# Altium PCB 电子脚铐手持式主控板V3.PcbDoc (part 1 of 3)
Units mm, origin at the board's own origin, x right, y up, seen from the top; angles counter-clockwise.
Board outline 100 x 95 mm, 2 copper layers (Top Layer, Bottom Layer); 124 components, 70 nets, 370 pads, 89 vias.
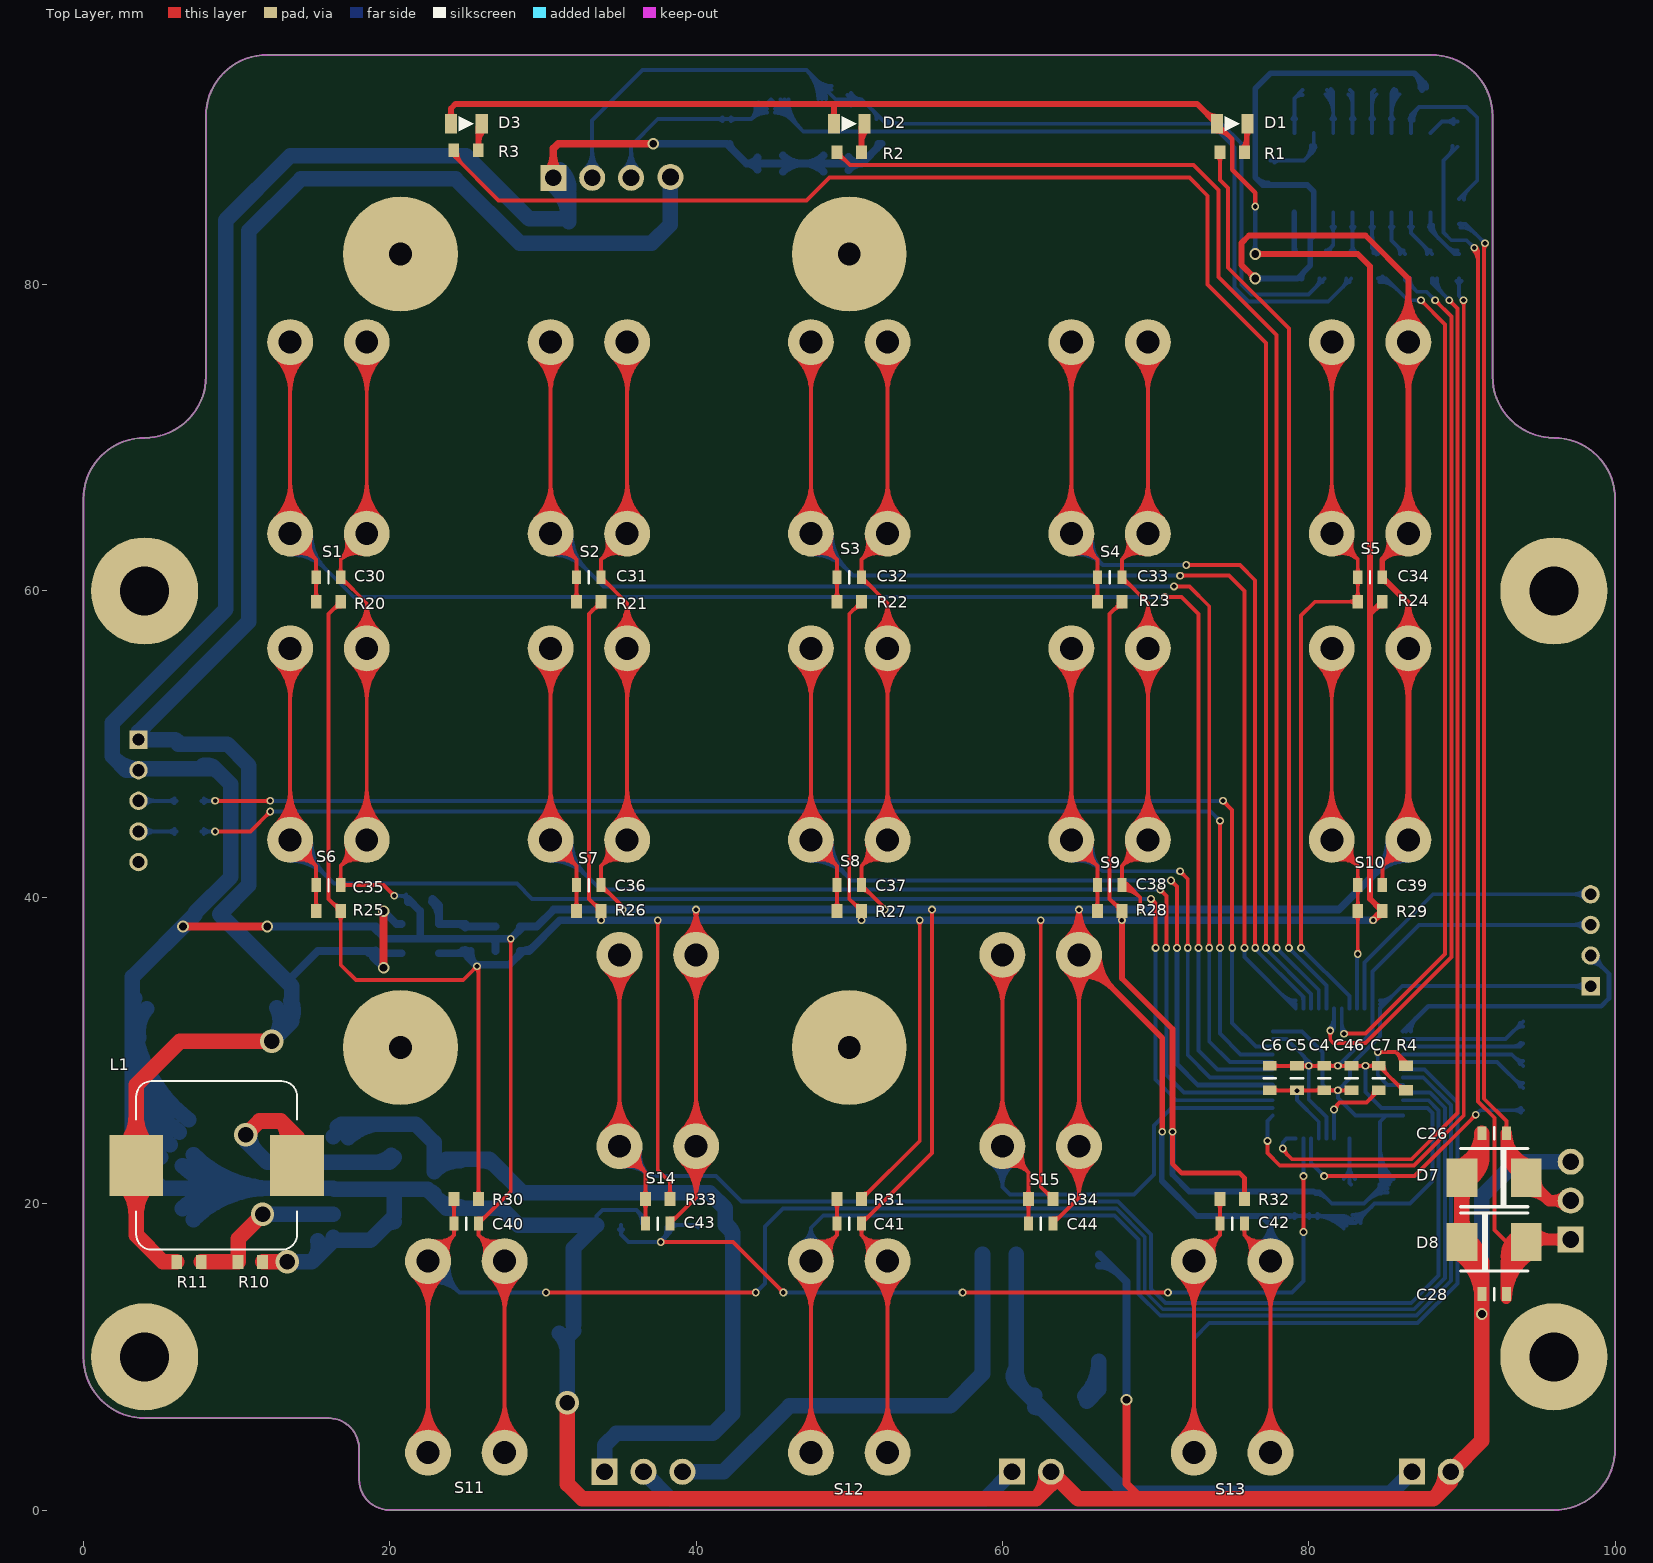
[diagram p0: Top Layer view]
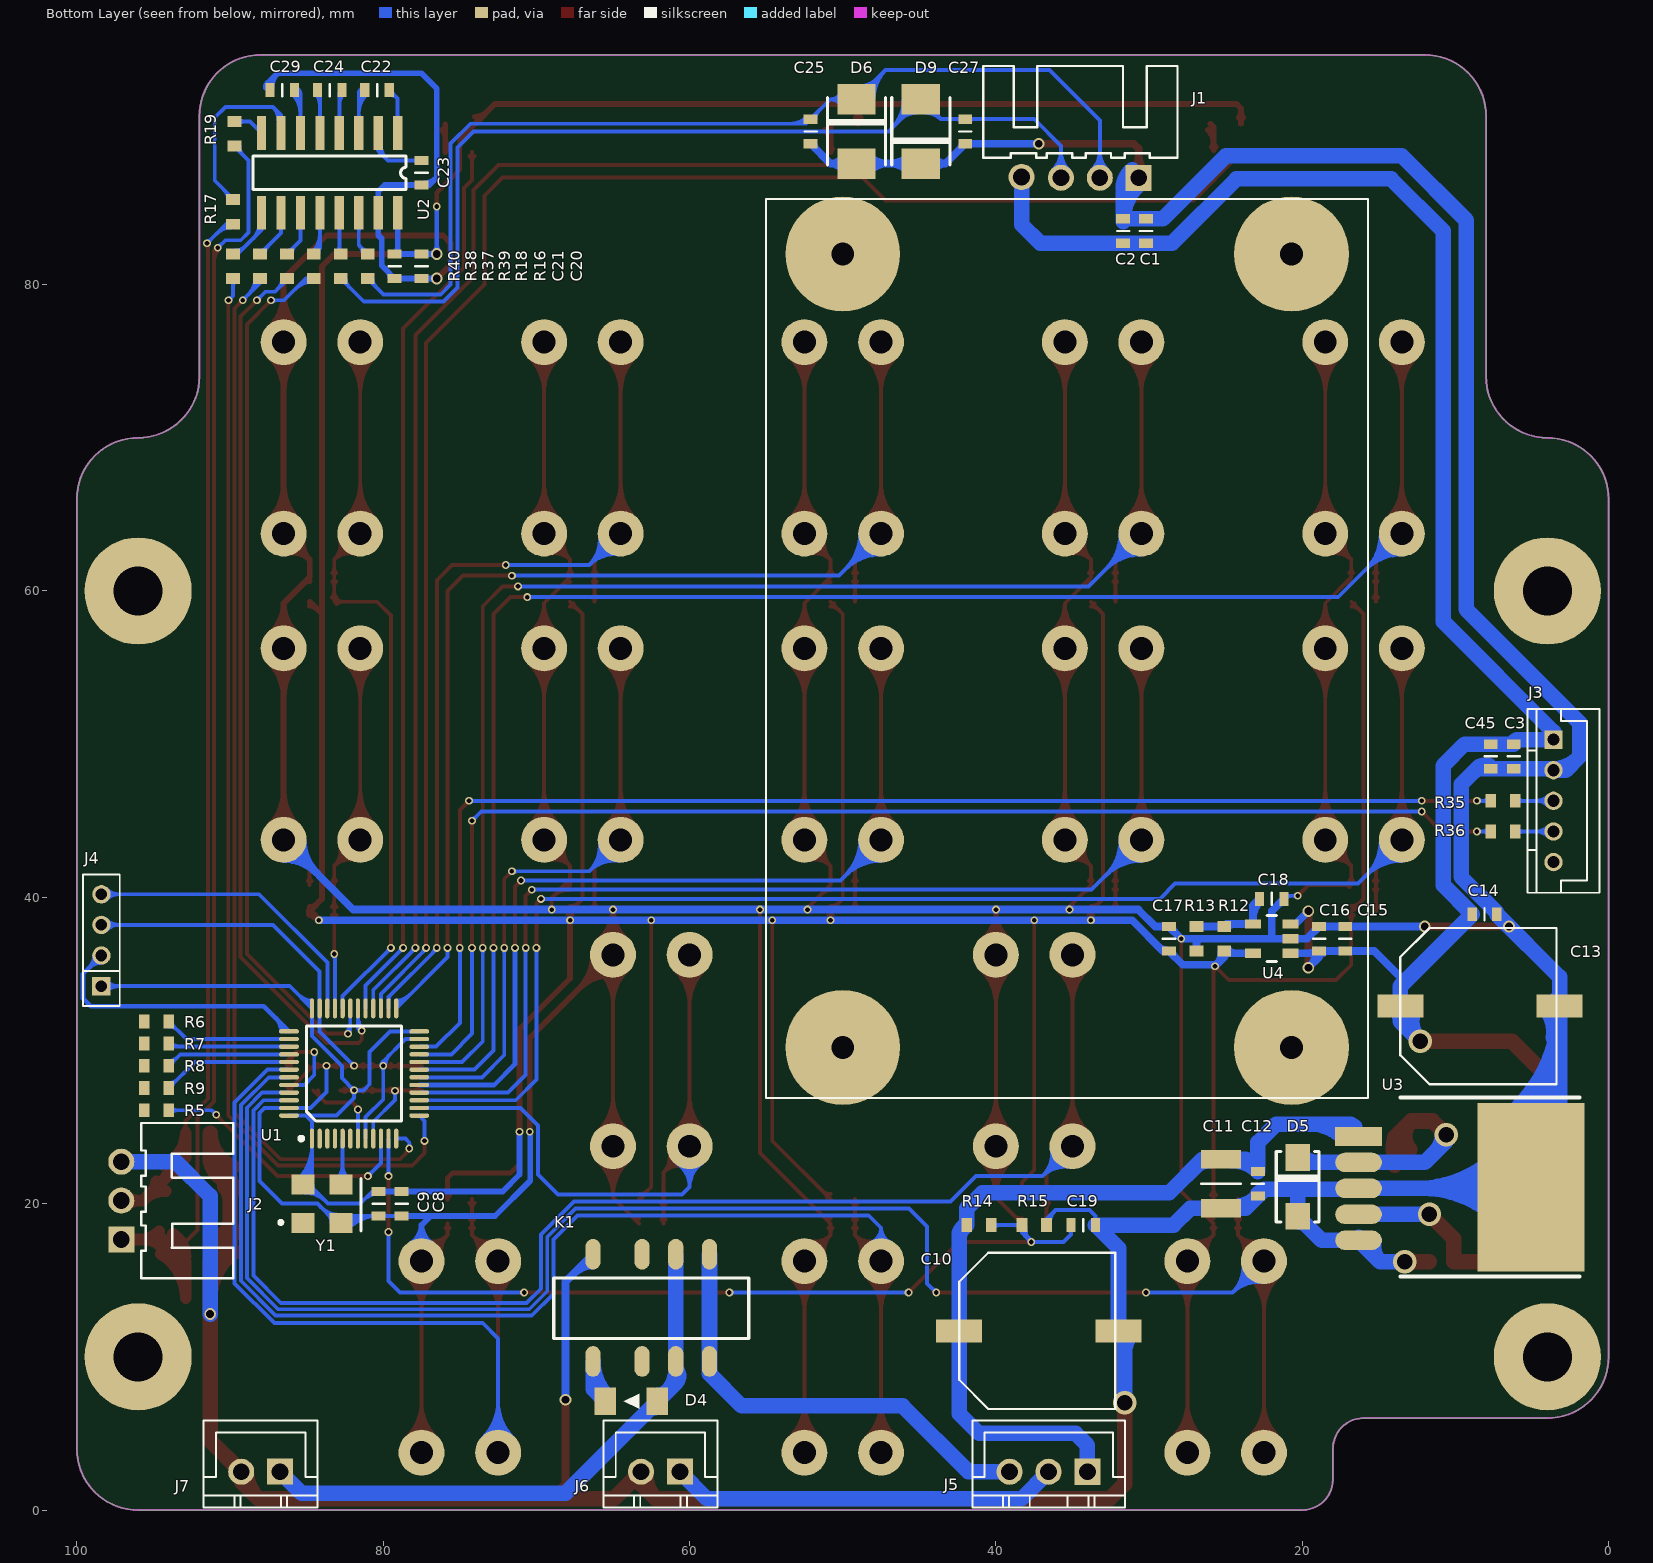
[diagram p1: Bottom Layer view, seen from below]
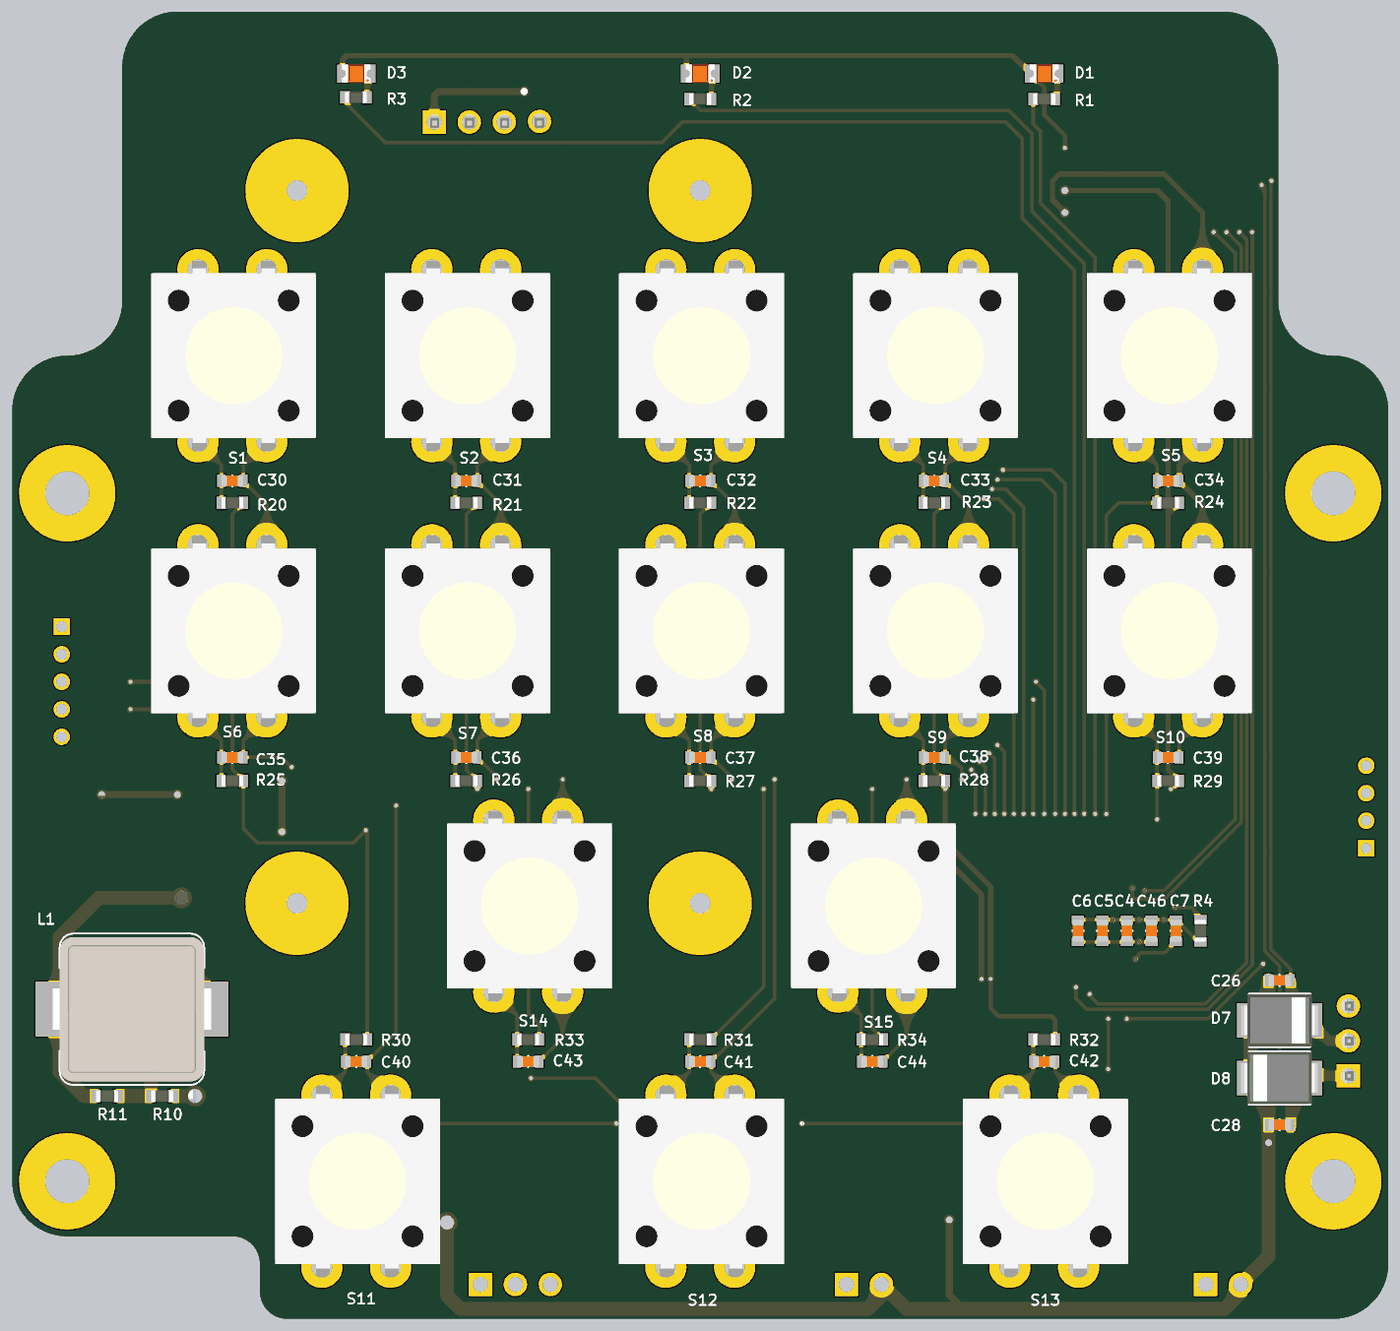
[diagram p4: 3D render of the assembled board from above, using the file's embedded part models]
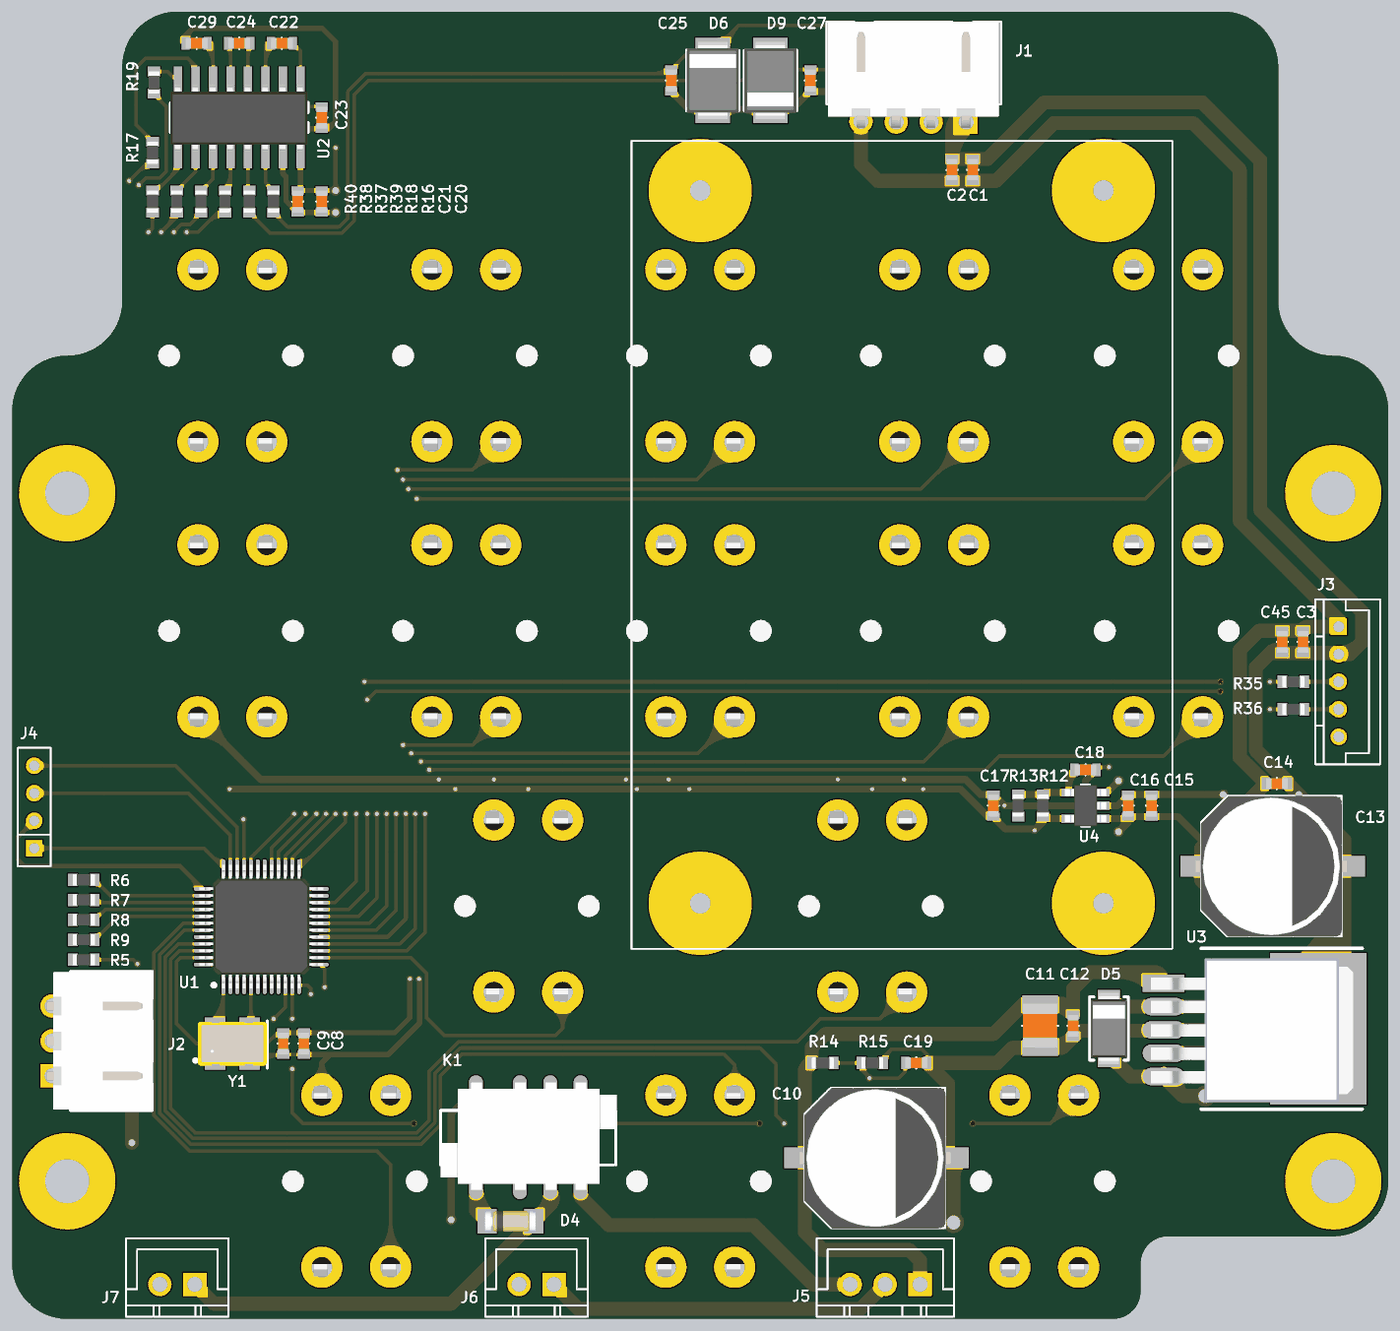
[diagram p5: 3D render of the assembled board from below, using the file's embedded part models]

## Layer stack, top to bottom
Top Solder: solder mask 0.0102, Solder Resist, Dk 3.5
Top Layer: signal copper 0.0356
Dielectric 1: dielectric 0.32, FR-4, Dk 4.8
Bottom Layer: signal copper 0.0356
Bottom Solder: solder mask 0.0102, Solder Resist, Dk 3.5

## Board outline
4,6 cw(c4,10) 0,10 0,66 cw(c4,66) 4,70 ccw(c4,74) 8,74 8,91 cw(c12,91) 12,95 88,95 cw(c88,91) 92,91 92,74 ccw(c96,74) 96,70 cw(c96,66) 100,66 100,4 cw(c96,4) 96,0 20,0 cw(c20,2) 18,2 18,4 ccw(c16,4) 16,6

## Design rules (kind name [scope] priority, off if disabled: settings)
Clearance [All] p1: gap=0.152
ComponentClearance [All] p1: gap=0 collisioncheckmode=3 verticalgap=0 showdistances=FALSE
Height [All] p1: minheight=0 maxheight=50.8 prefheight=12.7
HoleSize [All] p1: absolutevalues=TRUE maxlimit=5.08 minlimit=0.025 maxpercent=80.000 minpercent=20.000
HoleToHoleClearance [All] p1: gap=0.152 allowstackedmicrovias=TRUE
MinimumSolderMaskSliver [All] p1: minsoldermaskwidth=0
PlaneConnect [All] p1: planeconnectstyle=Direct reliefexpansion=0.508 reliefentries=4 reliefconductorwidth=0.254 reliefairgap=0.254
PolygonConnect [All] p1: connectstyle=Direct reliefconductorwidth=0.254 reliefentries=4 polygonreliefangle="90 Angle" airgapwidth=0.254
RoutingVias [All] p1: holewidth=0.711 width=1.27 viastyle="Through Hole" minholewidth=0.203 minwidth=0.305 maxholewidth=5.08 maxwidth=7.62
SilkToSilkClearance [All] p1: silktosilkclearance=0
SilkToSolderMaskClearance [IsPad] p1: minsilkscreentomaskgap=0 clearancetoexposedcopper=TRUE
SolderMaskExpansion [All] p1: expansion=0.102
Width [All] p1: maxlimit=4 minlimit=0.254 preferedwidth=0.254
21 further rules are at their usual default settings.

## Classes and differential pairs
component class Designator: C30 C31 C32 C33 C34 C35 C36 C37 C38 C39 C40 C41 C42 C43 C44 R20 R21 R22 R23 R24 R25 R26 R27 R28 R29 R30 R31 R32 R33 R34 S1 S2 S3 S4 S5 S6 S7 S8 S9 S10 S11 S12 S13 S14 S15
component class 电子脚铐手持式主控板_Frame: C1 C2 C3 C45 J1 J2 J3 R35 R36

## Components (designator, comment, footprint, x,y, rotation, side; value= is the part's Value field where it differs from the comment)
C1 "10uF" C0603 30.2,83.5 r90 bottom
C2 "0.1uF" C0603 31.7,83.5 r90 bottom
C3 "0.1uF" C0603 6.2,49.2 r270 bottom
C4 "0.1uF" C0603 81.01,28.2 r90 top
C5 "0.1uF" C0603 79.23,28.2 r90 top
C6 "0.1uF" C0603 77.45,28.2 r90 top
C7 "0.1uF" C0603 84.57,28.2 r90 top
C8 "10uF" C0603 78.8,20 r90 bottom
C9 "0.1uF" C0603 80.3,20 r90 bottom
C10 "470uF/35V" C10*10.8 37.3,11.7 r90 bottom
C11 "22uF" C1210 25.3,21.3 r270 bottom
C12 "0.1uF" C0603 22.9,21.3 r270 bottom
C13 "470uF/35V" C10*10.8 8.5,32.9 r90 bottom
C14 "0.1uF" C0603 8.1,38.9 r180 bottom
C15 "10uF" C0603 17.2,37.3 r90 bottom
C16 "0.1uF" C0603 18.9,37.3 r90 bottom
C17 "10uF" C0603 28.7,37.3 r90 bottom
C18 "470pF" C0603 22,39.9 r180 bottom
C19 "0.1uF" C0603 34.3,18.6 r180 bottom
C20 "10uF" C0603 77.5,81.2 r270 bottom
C21 "0.1uF" C0603 79.257,81.2 r270 bottom
C22 "0.1uF" C0603 80.4,92.7 r0 bottom
C23 "0.1uF" C0603 77.5,87.3 r90 bottom
C24 "0.1uF" C0603 83.5,92.7 r0 bottom
C25 "100pF" C0603 52.1,90 r90 bottom
C26 "100pF" C0603 92.1,24.6 r0 top
C27 "100pF" C0603 42,90 r270 bottom
C28 "100pF" C0603 92.1,14.1 r180 top
C29 "0.1uF" C0603 86.6,92.7 r180 bottom
C30 "0.1uF" C0603 16,60.9 r0 top
C31 "0.1uF" C0603 33,60.9 r0 top
C32 "0.1uF" C0603 50,60.9 r0 top
C33 "0.1uF" C0603 67,60.9 r0 top
C34 "0.1uF" C0603 84,60.9 r0 top
C35 "0.1uF" C0603 16,40.8 r0 top
C36 "0.1uF" C0603 33,40.8 r0 top
C37 "0.1uF" C0603 50,40.8 r0 top
C38 "0.1uF" C0603 67,40.8 r0 top
C39 "0.1uF" C0603 84,40.8 r0 top
C40 "0.1uF" C0603 25,18.7 r0 top
C41 "0.1uF" C0603 50,18.7 r0 top
C42 "0.1uF" C0603 75,18.7 r0 top
C43 "0.1uF" C0603 37.5,18.7 r0 top
C44 "0.1uF" C0603 62.5,18.7 r0 top
C45 "10uF" C0603 7.7,49.2 r270 bottom
C46 "0.1uF" C0603 82.79,28.2 r90 top
D1 "LED" LED0805 75,90.5 r0 top locked
D2 "LED" LED0805 50,90.5 r0 top locked
D3 "LED" LED0805 25,90.5 r0 top locked
D4 "1N4148" SOD-80-S 63.8,7.1 r0 bottom
D5 "SS14" SMA 20.3,21.1 r90 bottom
D6 "SMBJ16CA" SMB 49.1,90 r90 bottom
D7 "SMBJ16CA" SMB 92.1,21.7 r0 top
D8 "SMBJ16CA" SMB 92.1,17.5 r180 top
D9 "SMBJ16CA" SMB 44.9,90 r270 bottom
J1 "Jack 1x4" XH-4AW 34.5,87 r180 bottom
J2 "Jack 1x3" XH-3AW 97.1,20.2 r270 bottom
J3 "Jack 1x5" PH-5A 3.6,46.3 r270 bottom
J4 "SHD1X4-2.00" Jk1*4-2.0 98.4,37.2 r90 bottom
J5 "YX-XH-3" YX-XH-3 36.565,2.5 r180 bottom
J6 "YX-XH-2" YX-XH-2 61.9,2.502 r180 bottom
J7 "YX-XH-2" YX-XH-2 88,2.502 r180 bottom
K1 "G6K-2F-Y-12V" G6K-2F-Y 62.5,13.2 r180 bottom
L1 "33uH" L10.5*11.5mm 8.7,22.5 r180 top
R1 "1K" R0603 75,88.646 r0 top locked
R2 "1K" R0603 50,88.646 r0 top locked
R3 "1K" R0603 24.981,88.773 r0 top locked
R4 "100K" R0603 86.35,28.2 r270 top
R5 "NC" R0603 94.8,26.1 r0 bottom
R6 "NC" R0603 94.8,31.9 r0 bottom
R7 "NC" R0603 94.8,30.45 r0 bottom
R8 "NC" R0603 94.8,29 r0 bottom
R9 "NC" R0603 94.8,27.55 r0 bottom
R10 "3.3K" R0603 10.9,16.2 r0 top
R11 "10K" R0603 6.9,16.2 r0 top
R12 "100K" R0603 25.1,37.3 r90 bottom
R13 "160K" R0603 26.9,37.3 r270 bottom
R14 "100K" R0603 41.1,18.6 r0 bottom
R15 "10K" R0603 37.5,18.6 r0 bottom
R16 "10R" R0603 81.014,81.2 r270 bottom
R17 "10R" R0603 89.8,84.75 r270 bottom
R18 "10R" R0603 82.771,81.2 r270 bottom
R19 "10R" R0603 89.7,89.85 r270 bottom
R20 "10K" R0603 16,59.3 r0 top
R21 "10K" R0603 33,59.3 r0 top
R22 "10K" R0603 50,59.3 r0 top
R23 "10K" R0603 67,59.3 r0 top
R24 "10K" R0603 84,59.3 r0 top
R25 "10K" R0603 16,39.1 r0 top
R26 "10K" R0603 33,39.1 r0 top
R27 "10K" R0603 50,39.1 r0 top
R28 "10K" R0603 67,39.1 r0 top
R29 "10K" R0603 84,39.1 r0 top
R30 "10K" R0603 25,20.3 r0 top
R31 "10K" R0603 50,20.3 r0 top
R32 "10K" R0603 75,20.3 r0 top
R33 "10K" R0603 37.5,20.3 r0 top
R34 "10K" R0603 62.5,20.3 r0 top
R35 "10R" R0603 6.9,46.3 r0 bottom
R36 "10R" R0603 6.9,44.3 r0 bottom
R37 "10R" R0603 86.286,81.2 r90 bottom
R38 "10R" R0603 88.043,81.2 r90 bottom
R39 "10R" R0603 84.529,81.2 r90 bottom
R40 "10R" R0603 89.8,81.2 r90 bottom
S1 "Switch" B3F-4055 16,70 r90 top locked
S2 "Switch" B3F-4055 33,70 r90 top locked
S3 "Switch" B3F-4055 50,70 r90 top locked
S4 "Switch" B3F-4055 67,70 r90 top locked
S5 "Switch" B3F-4055 84,70 r90 top locked
S6 "Switch" B3F-4055 16,50 r90 top locked
S7 "Switch" B3F-4055 33,50 r90 top locked
S8 "Switch" B3F-4055 50,50 r90 top locked
S9 "Switch" B3F-4055 67,50 r90 top locked
S10 "Switch" B3F-4055 84,50 r90 top locked
S11 "Switch" B3F-4055 25,10 r90 top
S12 "Switch" B3F-4055 50,10 r90 top
S13 "Switch" B3F-4055 75,10 r90 top locked
S14 "Switch" B3F-4055 37.5,30 r90 top locked
S15 "Switch" B3F-4055 62.5,30 r90 top locked
U1 "STM32F103CB" LQFP48 81.9,28.5 r90 bottom
U2 "SP3232EEN" SO16 83.5,87.3 r270 bottom
U3 "LM2596-ADJ" TO-263-5 10.7,21 r270 bottom
U4 "MIC5219YM5" SOT-23-5 22,37.3 r0 bottom
Y1 "XTAL 8MHz" XTAL5032 84,20 r180 bottom

## Footprints (in the part's own frame and the unit in brackets; to place one, negate y for a bottom-side part, rotate by r counter-clockwise, add the part's x,y. Pads: shape width x height; smd on the part's side, far side on the other; paste and mask are expansions set on the pad)
B3F-4055 [mm]
  round 3 hole 1.5: 1(-6.25,-2.5) 1(6.25,-2.5) 2(-6.25,2.5) 2(6.25,2.5)
  body extent -6.9,-6.1 6.9,5.9, height 7.3
C10*10.8 [mm] "470uF/35V"
  rect 1.5x3 smd: 1(0,5.1) 2(0,-5.3)
  silkscreen extent -5.1,-5.1 5.1,5.1, body extent -5.13,-5.5 5.1,5.5, height 10.56
C0603 [mm]
  rect 0.6x0.9 smd: 1(-0.8,0) 2(0.8,0)
  silkscreen extent 0,-0.4 0,0.4, body extent -0.8,-0.4 0.8,0.4, height 0.5
C1210 [mm]
  rect 1.2x2.6 smd: 1(-1.6,0) 2(1.6,0)
  silkscreen extent 0,-1.3 0,1.3, body extent -1.6,-1.25 1.6,1.25, height 0.95
G6K-2F-Y [mm]
  oval 1x2 smd: 1(-3.8,-3.5) 2(-0.6,-3.5) 3(1.6,-3.5) 4(3.8,-3.5) 5(3.8,3.5) 6(1.6,3.5) 7(-0.6,3.5) 8(-3.8,3.5)
  silkscreen extent -6.37,-2.01 6.36,1.95, body extent -6.36,-3.83 6.44,3.97, height 5.4
Jk1*4-2.0 [mm] "4P，直插，2.0mm间距，排母"
  rect 1.2x1.2 hole 0.762: 1(-3,0)
  round 1.2 hole 0.762: 2(-1,0) 3(1,0) 4(3,0)
  silkscreen extent -4.3,-1.2 4.3,1.2, body extent -4.25,-1.22 4.25,1.18, height 4.3
L10.5*11.5mm [mm] "AMPI104CEL"
  rect 3.5x4 smd: 1(-5.25,0) 2(5.25,0)
  silkscreen extent -5.25,-5.5 5.25,5.5, body extent -5.75,-5.25 5.75,5.25, height 4.01
LED0805 [mm]
  rect 0.8x1.3 smd: 1(-1,0) 2(1,0)
  silkscreen extent -0.5,-0.5 0.5,0.5, body extent -1.05,-0.68 1.05,0.67, height 0.8
LQFP48 [mm]
  oval 1.3x0.28 smd: 1(-4.25,2.75) 2(-4.25,2.25) 3(-4.25,1.75) 4(-4.25,1.25) 5(-4.25,0.75) 6(-4.25,0.25) 7(-4.25,-0.25) 8(-4.25,-0.75) 9(-4.25,-1.25) 10(-4.25,-1.75) 11(-4.25,-2.25) 12(-4.25,-2.75) 25(4.25,-2.75) 26(4.25,-2.25) 27(4.25,-1.75) 28(4.25,-1.25) 29(4.25,-0.75) 30(4.25,-0.25) 31(4.25,0.25) 32(4.25,0.75) 33(4.25,1.25) 34(4.25,1.75) 35(4.25,2.25) 36(4.25,2.75)
  oval 0.28x1.3 smd: 13(-2.75,-4.25) 14(-2.25,-4.25) 15(-1.75,-4.25) 16(-1.25,-4.25) 17(-0.75,-4.25) 18(-0.25,-4.25) 19(0.25,-4.25) 20(0.75,-4.25) 21(1.25,-4.25) 22(1.75,-4.25) 23(2.25,-4.25) 24(2.75,-4.25) 37(2.75,4.25) 38(2.25,4.25) 39(1.75,4.25) 40(1.25,4.25) 41(0.75,4.25) 42(0.25,4.25) 43(-0.25,4.25) 44(-0.75,4.25) 45(-1.25,4.25) 46(-1.75,4.25) 47(-2.25,4.25) 48(-2.75,4.25)
  silkscreen extent -4.37,-3.1 3.1,3.58, body extent -4.49,-4.5 4.5,4.5, height 1.8
PH-5A [mm] "5P，立贴，2.0mm间距，无锁座"
  rect 1.2x1.2 hole 0.8: 1(-4,0)
  round 1.2 hole 0.8: 2(-2,0) 3(0,0) 4(2,0) 5(4,0)
  silkscreen extent -6,-1.7 6,3
R0603 [mm]
  rect 0.7x0.9 smd: 1(-0.8,0) 2(0.8,0)
  body extent -0.8,-0.4 0.8,0.4, height 0.37
SMA [mm]
  rect 1.75x1.6 smd: 1(-1.925,0) 2(1.925,0)
  silkscreen extent -2.3,-1.5 2.3,1.5, body extent -2.6,-1.32 2.6,1.32, height 2.15
SMB [mm]
  rect 2x2.5 smd: 1(-2.1,0) 2(2.1,0)
  silkscreen extent -2.2,-1.9 2.2,1.9, body extent -2.79,-1.91 2.81,1.89, height 2.4
SO16 [mm]
  rect 2.2x0.6 smd: 1(-2.6,4.445) 2(-2.6,3.175) 3(-2.6,1.905) 4(-2.6,0.635) 5(-2.6,-0.635) 6(-2.6,-1.905) 7(-2.6,-3.175) 8(-2.6,-4.445) 9(2.6,-4.445) 10(2.6,-3.175) 11(2.6,-1.905) 12(2.6,-0.635) 13(2.6,0.635) 14(2.6,1.905) 15(2.6,3.175) 16(2.6,4.445)
  silkscreen extent -1.1,-5 1.1,5, body extent -2.92,-5.02 3.02,4.95, height 1.35
SOD-80-S [mm]
  rect 1.4x1.8 smd: 1(-1.7,0) 2(1.7,0)
  silkscreen extent -0.5,-0.5 0.5,0.5, body extent -1.85,-0.79 1.85,0.81, height 1.6
SOT-23-5 [mm]
  rect 1.05x0.6 smd: 1(-1.225,0.95) 2(-1.225,0) 3(-1.225,-0.95) 4(1.225,-0.95) 5(1.225,0.95)
  silkscreen extent -0.3,-1.5 0.3,1.5, body extent -1.5,-1.5 1.5,1.5, height 1.2
TO-263-5 [mil]
  rect 433.07x275.59 smd: 0(-3.33,221.44)
  rect 50x120 smd: 1(-133.33,-221.44)
  oval 50x120 smd: 2(-66.67,-221.44) 3(0,-221.44) 4(66.67,-221.44) 5(133.33,-221.44)
  silkscreen extent -233,-114 227,346, body extent -204,-258 207,321, height 177
XH-3AW [mm]
  rect 1.7x1.7 hole 1.1: 1(2.54,0)
  round 1.7 hole 1.1: 2(0,0) 3(-2.54,0)
  silkscreen extent -5.07,1.3 5.07,7.3, body extent -5,-0.37 5,7.33, height 5.85
XH-4AW [mm]
  rect 1.7x1.7 hole 1.1: 1(3.823,-0.025)
  round 1.7 hole 1.1: 2(1.283,-0.025) 3(-1.257,-0.025) 4(-3.822,0.025)
  silkscreen extent -6.33,1.27 6.35,7.27, body extent -6.2,-0.42 6.2,7.28, height 5.75
XTAL5032 [mm]
  rect 1.5x1.3 smd: 1(-1.25,-1.25) 2(1.25,-1.25) 3(1.25,1.25) 4(-1.25,1.25)
  silkscreen extent -2.81,-1.78 2.54,1.65, body extent -2.5,-1.6 2.5,1.6, height 1.2
YX-XH-2 [mm] "2P，直插，2.54mm间距，无锁座"
  rect 1.7x1.7 hole 1.1: 1(1.27,0)
  round 1.7 hole 1.1: 2(-1.27,0)
  silkscreen extent -3.72,-2.35 3.72,3.35, body extent -3.71,-2.36 3.73,3.34, height 7
YX-XH-3 [mm] "3P，直插，2.54mm间距，无锁座"
  rect 1.7x1.7 hole 1.1: 1(2.54,0)
  round 1.7 hole 1.1: 2(0,0) 3(-2.54,0)
  silkscreen extent -4.98,-2.35 5,3.35, body extent -4.98,-2.33 5,3.37, height 7

## Part data
C1 C2 C3 C4 C5 C6 C7 C8 C9 C11 C12 C14 C15 C16 C17 C18 C19 C20 C21 C22 C23 C24 C25 C26 C27 C28 C29 C45 C46: library part CAP, "CAP"
C10 C13: library part ELECTRO, "Electrolytic Capacitor"
C30 C31 C32 C33 C34 C35 C36 C37 C38 C39 C40 C41 C42 C43 C44: library part Cap, "Capacitor"
D4: library part DIODE-SWITCHING, "Silicon Epitaxial Planar Diodes"
D5: library part "Diode 1N4148", "High Conductance Fast Diode"
D6 D7 D8 D9: library part BS0300N
J1 J2 J3: "插座"
J4: library part HEADER1X4
J5: library part HEADER1X3
J6 J7: library part "Jack 1x2", "插座"
K1: library part G6K-2F-Y
L1: library part INDUCTOR, "INDUCTOR"
R1 R2 R3 R4 R5 R6 R7 R8 R9 R10 R11 R14 R15 R20 R21 R22 R23 R24 R25 R26 R27 R28 R29 R30 R31 R32 R33 R34: library part RES, "Resistor"
R12 R13: library part Res
R16 R17 R18 R19 R35 R36 R37 R38 R39 R40: library part Res, "Resistor"
S1 S2 S3 S4 S5 S6 S7 S8 S9 S10 S11 S12 S13 S14 S15: library part Sw
U1: library part STM32F103Cx
U2: library part MAX232ACPE, "+5V Powered, Multi-Channel RS-232 Driver/Receiver"
U3: library part LM25x6-5, "LM2596-5;LM2576-5"
U4: library part MIC5205
Y1: library part XTAL

## Free pads (board coordinates)
  round 7 hole 3.2: ""(4,10) ""(4,60) ""(96,10) ""(96,60)
  round 7.5 hole 1.5: ""(20.7,30.2) ""(20.7,82) ""(50,30.2) ""(50,82)

## Via types
v1: diameter 0.508, hole 0.305, Top Layer to Bottom Layer, tented both sides, 75 vias
v2: diameter 0.762, hole 0.508, Top Layer to Bottom Layer, tented both sides, 9 vias
v3: diameter 1.524, hole 1.016, Top Layer to Bottom Layer, tented both sides, 5 vias

## Nets (pads, with @x,y where several pads share a name; then routed paths per layer and width w, separated by ;. In a path a pad name is that pad's centre, name@x,y a point inside that pad or via, vN(x,y) a via of type N, cw(c..) or ccw(c..) an arc to the next point about the centre after c; other vN are vias at no path point)
+3.3V: C4.1 C5.1 C6.1 C8.2 C9.2 C17.1 C20.1 C21.1 C46.1 D1.1 D2.1 D3.1 J4.1 R12.1 R20.2 R21.2 R22.2 R23.2 R24.2 R25.2 R26.2 R27.2 R28.2 R29.2 R30.2 R31.2 R32.2 R33.2 R34.2 U1.1 U1.9 U1.24 U1.36 U1.48 U2.16 U4.5 Y1.4 | length 493
  Top Layer w0.254: 16.249,39.651 ccw(c16.8,40.203) R25.2@16.8,39.423 ; 16.249,58.749 cw(c16.8,58.197) R20.2@16.8,58.977 ; R25.2@16.49,39.41 cw(c16.28,39.2) R25.2@16.577,39.2 ; R20.2@16.49,58.99 ccw(c16.28,59.2) R20.2@16.577,59.2 ; R25.2@16.642,38.842 cw(c16.262,38.462) 16.8,38.462 cw(c17.338,38.462) R25.2@16.958,38.842 ; R20.2@16.8,59.3 16,58.5 16,39.9 R25.2@16.8,39.1 16.8,35.6 17.8,34.6 24.8,34.6 v1(25.7,35.5) ; v1@25.573,35.5 cw(c25.266,35.5) 25.483,35.283 cw(c25.7,35.066) v1@25.7,35.373 ; v1@25.61,35.41 cw(c25.152,34.952) 25.8,34.952 ; R30.2@25.642,20.558 ccw(c25.262,20.938) 25.8,20.938 ccw(c26.338,20.938) R30.2@25.958,20.558 ; R30.2@25.8,20.3 v1@25.8,35.4 ; 33.249,39.651 ccw(c33.8,40.203) R26.2@33.8,39.423 ; 33.249,58.749 cw(c33.8,58.197) R21.2@33.8,58.977 ; R26.2@33.49,39.41 cw(c33.28,39.2) R26.2@33.577,39.2 ; R21.2@33.49,58.99 ccw(c33.28,59.2) R21.2@33.577,59.2 ; R26.2@33.651,38.834 cw(c33.351,38.5) v1(33.8,38.5) ; v1@33.71,38.59 ccw(c33.493,38.807) 33.8,38.807 ccw(c34.107,38.807) v1@33.89,38.59 ; R21.2@33.8,59.3 33,58.5 33,39.9 R26.2@33.8,39.1 v1(33.8,38.5) ; R26.2@33.949,38.834 ccw(c34.249,38.5) v1(33.8,38.5) ; v1@37.41,38.41 cw(c37.193,38.193) 37.5,38.193 cw(c37.807,38.193) v1@37.59,38.41 ; v1(37.5,38.5) 37.5,22.2 38.3,21.4 R33.2@38.3,20.3 ; R33.2@38.142,20.558 ccw(c37.762,20.938) 38.3,20.938 ccw(c38.838,20.938) R33.2@38.458,20.558 ; 50.249,39.651 ccw(c50.8,40.203) R27.2@50.8,39.423 ; 50.249,58.749 cw(c50.8,58.197) R22.2@50.8,58.977 ; R27.2@50.49,39.41 cw(c50.28,39.2) R27.2@50.577,39.2 ; R22.2@50.49,58.99 ccw(c50.28,59.2) R22.2@50.577,59.2 ; R27.2@50.651,38.834 cw(c50.351,38.5) v1(50.8,38.5) ; v1@50.71,38.59 ccw(c50.493,38.807) 50.8,38.807 ccw(c51.107,38.807) v1@50.89,38.59 ; R31.2@50.8,20.3 54.6,24.1 v1(54.6,38.5) ; R31.2@50.8,20.623 ccw(c50.8,21.403) 51.351,20.851 ; R22.2@50.8,59.3 50,58.5 50,39.9 R27.2@50.8,39.1 v1(50.8,38.5) ; R27.2@50.949,38.834 ccw(c51.249,38.5) v1(50.8,38.5) ; R31.2@51.023,20.4 cw(c51.32,20.4) R31.2@51.11,20.61 ; v1@54.51,38.41 cw(c54.293,38.193) 54.6,38.193 cw(c54.907,38.193) v1@54.69,38.41 ; v1@62.41,38.41 cw(c62.193,38.193) 62.5,38.193 cw(c62.807,38.193) v1@62.59,38.41 ; v1(62.5,38.5) 62.5,21.1 R34.2@63.3,20.3 ; 62.749,20.851 ccw(c63.3,21.403) R34.2@63.3,20.623 ; R34.2@62.99,20.61 cw(c62.78,20.4) R34.2@63.077,20.4 ; 67.249,39.651 ccw(c67.8,40.203) R28.2@67.8,39.423 ; 67.249,58.749 cw(c67.8,58.197) R23.2@67.8,58.977 ; R28.2@67.49,39.41 cw(c67.28,39.2) R28.2@67.577,39.2 ; R23.2@67.49,58.99 ccw(c67.28,59.2) R23.2@67.577,59.2 ; R28.2@67.651,38.834 cw(c67.351,38.5) v1(67.8,38.5) ; v1@67.71,38.59 ccw(c67.493,38.807) 67.8,38.807 ccw(c68.107,38.807) v1@67.89,38.59 ; R23.2@67.8,59.3 67,58.5 67,39.9 R28.2@67.8,39.1 v1(67.8,38.5) ; R28.2@67.949,38.834 ccw(c68.249,38.5) v1(67.8,38.5) ; C6.1@77.45,27.4 C5.1@79.23,27.4 C4.1@81.01,27.4 C46.1@82.79,27.4 ; C6.1@77.722,27.278 cw(c78.018,26.982) 78.018,27.4 cw(c78.018,27.818) C6.1@77.722,27.522 ; C5.1@78.851,27.4 cw(c78.851,26.991) C5.1@79.14,27.28 ; C5.1@78.958,27.278 ccw(c78.662,26.982) 78.662,27.4 ccw(c78.662,27.818) C5.1@78.958,27.522 ; C5.1@79.32,27.28 cw(c79.609,26.991) C5.1@79.609,27.4 ; C5.1@79.502,27.278 cw(c79.798,26.982) 79.798,27.4 cw(c79.798,27.818) C5.1@79.502,27.522 ; C4.1@80.738,27.278 ccw(c80.442,26.982) 80.442,27.4 ccw(c80.442,27.818) C4.1@80.738,27.522 ; C4.1@81.282,27.278 cw(c81.578,26.982) 81.578,27.4 cw(c81.578,27.818) C4.1@81.282,27.522 ; v1@81.81,27.31 ccw(c81.593,27.093) 81.593,27.4 ccw(c81.593,27.707) v1@81.81,27.49 ; v1@81.99,27.31 cw(c82.207,27.093) 82.207,27.4 cw(c82.207,27.707) v1@81.99,27.49 ; C46.1@82.518,27.278 ccw(c82.222,26.982) 82.222,27.4 ccw(c82.222,27.818) C46.1@82.518,27.522
  Top Layer w0.305: v1(71.1,24.7) 71.1,22.6 71.7,22 75.5,22 75.8,21.7 R32.2@75.8,20.3 ; D1.1@74,90.002 cw(c74,88.801) 74.85,89.65 ; D1.1@74,90.5 75,89.5 75,87.5 76.5,86 v1(76.5,85.1) ; R32.2@75.66,20.54 ccw(c75.323,20.877) 75.8,20.877 ccw(c76.277,20.877) R32.2@75.94,20.54
  Top Layer w0.381: D3.1@23.852,90.898 ccw(c23.494,91.256) 24,91.256 ccw(c24.506,91.256) D3.1@24.148,90.898 ; D3.1@24,90.5 24,91.5 24.3,91.8 72.7,91.8 D1.1@74,90.5 ; D2.1@48.852,90.898 ccw(c48.494,91.256) 49,91.256 ccw(c49.506,91.256) D2.1@49.148,90.898 ; D2.1@49,90.5 49,91.7 ; v1(67.8,38.5) 67.8,34.7 71.1,31.4 v1(71.1,24.7) ; 73.216,91.284 ccw(c74,92.069) D1.1@74,90.959 ; v2(76.5,82) 83.2,82 84,81.2 84,58.5 ; v2@76.635,81.865 cw(c76.96,81.54) 76.96,82 cw(c76.96,82.46) v2@76.635,82.135 ; 84.357,39.543 ccw(c84.8,39.986) R29.2@84.8,39.359 ; 84.357,58.857 cw(c84.8,58.414) R24.2@84.8,59.041 ; R29.2@84.8,39.1 84,39.9 84,58.5 ; R24.2@84.8,59.3 84,58.5 ; v1@67.8,38.615 ccw(c67.415,38.615) 67.687,38.887 cw(c67.415,38.615) v1@67.8,38.615 ; v1@67.8,38.615 cw(c68.185,38.615) 67.913,38.887 ccw(c68.185,38.615) v1@67.8,38.615
  Top Layer w0.508: v1(84.2,38.5) R29.2@84.8,39.1 ; R29.2@84.465,38.765 cw(c84.8,38.431) R29.2@84.8,38.904
  Bottom Layer w0.254: U1.24@77.65,31.25 79.55,31.25 80.9,29.9 80.9,27.8 81.3,27.4 v1(81.9,27.4) ; v1@79.14,27.28 cw(c78.923,27.063) 79.23,27.063 cw(c79.537,27.063) v1@79.32,27.28 ; v1(79.23,27.37) 79.23,26.77 80.65,25.35 U1.9@80.65,24.25 ; C9.2@80.3,20.8 80.7,20.8 81.5,20 83.6,20 84.85,21.25 Y1.4@85.25,21.25 84.65,21.85 U1.1@84.65,24.25 84.65,25.35 85.05,25.75 ; C9.2@80.45,20.627 cw(c80.45,19.606) 81.172,20.328 ; v1@81.81,27.49 cw(c81.593,27.707) 81.593,27.4 cw(c81.593,27.093) 81.81,27.31 cw(c81.593,27.093) 81.9,27.093 cw(c82.207,27.093) v1@81.99,27.31 ; v1@81.9,27.527 ccw(c81.9,27.834) 82.117,27.617 ccw(c82.334,27.4) v1@82.027,27.4 ; 83.745,20.145 cw(c85.15,18.74) Y1.4@85.15,20.727 ; 84.179,20.579 cw(c85.15,19.607) Y1.4@85.15,20.981 ; 84.469,20.869 ccw(c84.089,21.25) Y1.4@84.627,21.25 ; Y1.4@84.65,21.88 ccw(c85.78,21.88) Y1.4@84.981,21.081 ; 84.65,22.493 ccw(c86.393,22.493) Y1.4@85.161,21.261 ; 84.65,23.107 ccw(c87.007,23.107) Y1.4@85.34,21.44 ; U1.1@84.65,23.72 ccw(c87.62,23.72) Y1.4@85.52,21.62 ; U1.36@84.65,32.765 ccw(c84.65,32.801) U1.36@84.676,32.776 ; U1.36@84.65,33.019 ccw(c84.65,33.668) 85.109,33.209 ; U1.36@84.65,33.273 ccw(c84.65,34.536) 85.543,33.643 ; U1.48@86.15,25.75 85.05,25.75 ; J4.1@98.066,33.866 ccw(c97.258,33.058) 97.258,34.2 ccw(c97.258,35.342) J4.1@98.066,34.534 ; J4.1@98.4,34.2 86.1,34.2 U1.36@84.65,32.75 84.65,30.95 82.7,29 82.7,28.2 v1(81.9,27.4) ; v1(81.9,27.4) 81.9,26.9 83.05,25.75 85.05,25.75
  Bottom Layer w0.305: v2@76.338,82.162 ccw(c75.948,82.552) 76.5,82.552 ccw(c77.052,82.552) v2@76.662,82.162 ; v2(76.5,82) v1(76.5,85.1)
  Bottom Layer w0.381: v1(71.1,24.7) 71.1,21.9 72.2,20.8 C8.2@78.8,20.8 C9.2@80.3,20.8 ; v2(76.5,82) C20.1@77.5,82 C21.1@79.257,82 79.055,82.202 U2.16@79.055,84.7 ; v2@76.635,81.865 cw(c76.96,81.54) 76.96,82 cw(c76.96,82.46) v2@76.635,82.135 ; 79.055,82.39 ccw(c79.497,82.39) C21.1@79.185,82.077
  Bottom Layer w0.508: U4.5@23.225,36.35 24.95,36.35 R12.1@25.1,36.5 25.1,36.1 v1@25.6,35.6 ; 24.406,36.35 ccw(c24.406,37.094) R12.1@24.932,36.568 ; R12.1@24.791,36.551 ccw(c25.05,36.519) R12.1@24.865,36.335 ; R12.1@25.295,36.488 ccw(c26.356,36.356) v1@25.6,35.6 ; v1(25.7,35.5) cw(c25.941,35.259) 25.941,35.6 ; v1@25.7,35.6 27.8,35.6 C17.1@28.7,36.5 29.1,36.5 31.1,38.5 v1(33.8,38.5) v1(37.5,38.5) v1(50.8,38.5) v1(54.6,38.5) v1(62.5,38.5) v1(67.8,38.5) v1(84.2,38.5) ; 28.365,36.165 ccw(c28.031,36.5) C17.1@28.504,36.5 ; C17.1@28.85,36.546 ccw(c28.85,37.261) 29.355,36.755
+5V: C1.1 C2.1 C3.1 C13.1 C14.1 C15.1 C16.1 C45.1 J1.4 J3.1 L1.2 R11.1 U4.1 U4.3 | length 154.9
  Top Layer w0.508: v2(19.6,35.4) v2(19.6,39.1)
  Top Layer w1.016: L1.2@2.572,21.372 cw(c0.452,19.252) 3.45,19.252 cw(c6.448,19.252) L1.2@4.328,21.372 ; L1.2@2.572,23.628 ccw(c0.452,25.748) 3.45,25.748 ccw(c6.448,25.748) L1.2@4.328,23.628 ; R11.1@6.1,16.2 5.2,16.2 3.45,17.95 L1.2@3.45,22.5 3.45,27.75 6.3,30.6 v3(12.3,30.6)
  Bottom Layer w0.508: 13.6,34.2 13.6,34.8 15.3,36.5 C15.1@17.2,36.5 C16.1@18.9,36.5 ; C16.1@18.588,36.5 ccw(c18.8,36.5) C16.1@18.65,36.35 ; C16.1@19.083,36.533 ccw(c19.523,36.973) 19.523,36.35 ; C16.1@19.096,36.5 ccw(c20.535,36.5) v2@19.517,35.483 ; v2(19.6,35.4) 18.9,36.1 C16.1@18.9,36.5 ; v2(19.6,39.1) 20.45,38.25 U4.3@20.775,38.25 ; U4.1@20.775,36.35 19.05,36.35 C16.1@18.9,36.5
  Bottom Layer w1.016: J3.1@3.692,50.3 cw(c5.121,50.3) 4.111,51.311 ; C3.1@5.828,50.3 cw(c5.828,49.778) C3.1@6.197,50.147 ; v3(12.3,30.6) 13.6,31.9 C13.1@13.6,32.9 13.6,34.2 C14.1@8.9,38.9 10.8,40.8 10.8,48.6 9.4,50 C45.1@7.7,50 C3.1@6.2,50 5.9,50.3 J3.1@3.6,50.3 3.6,50.8 10.8,58 10.8,83.5 14.2,86.9 24.3,86.9 28.5,82.7 C1.1@30.2,82.7 C2.1@31.7,82.7 37.1,82.7 38.322,83.922 J1.4@38.322,87.025 ; v3(12.3,30.6) ccw(c10.978,31.922) C13.1@12.635,32.788 ; 13.279,31.579 ccw(c12.263,32.594) C13.1@13.536,33.258
+12V: C10.1 C11.1 C12.1 J5.1 R14.2 U3.1 | length 62.4
  Bottom Layer w1.016: U3.1@16.324,24.387 17.138,25.2 21.7,25.2 22.9,24 C12.1@22.9,22.1 23.7,22.9 C11.1@25.3,22.9 26.5,22.9 28.7,20.7 40.9,20.7 41.9,19.7 R14.2@41.9,18.6 42.4,18.1 42.4,6.3 41.1,5 34.8,5 34.025,4.225 J5.1@34.025,2.5 ; U3.1@16.585,25.015 cw(c17.031,24.569) 17.031,25.2 ; U3.1@17.303,24.297 cw(c19.484,22.116) 19.484,25.2 ; C12.1@22.907,22.107 cw(c24.6,20.413) C11.1@24.6,22.808 ; C11.1@26,22.808 cw(c26,21.379) 27.011,22.389 ; R14.2@41.988,18.631 cw(c41.472,17.86) 42.4,17.86 ; R14.2@42.012,18.612 cw(c41.074,17.674) 42.4,17.674
AD_POW: C19.1 R14.1 R15.2 U1.11 | length 71
  Top Layer w0.254: v1(37.7,17.5) 42.4,17.5 v1(45.7,14.2) ; v1@37.79,17.41 cw(c38.007,17.193) 38.007,17.5 cw(c38.007,17.807) v1@37.79,17.59 ; v1@45.573,14.2 ccw(c45.266,14.2) 45.483,14.417 ccw(c45.7,14.634) v1@45.7,14.327 ; v1(57.4,14.2) v1(70.8,14.2) ; v1@57.49,14.11 cw(c57.707,13.893) 57.707,14.2 cw(c57.707,14.507) v1@57.49,14.29 ; v1@70.71,14.11 ccw(c70.493,13.893) 70.493,14.2 ccw(c70.493,14.507) v1@70.71,14.29 ; v1@79.56,18.24 ccw(c79.343,18.457) 79.65,18.457 ccw(c79.957,18.457) v1@79.74,18.24 ; v1@79.56,21.71 cw(c79.343,21.493) 79.65,21.493 cw(c79.957,21.493) v1@79.74,21.71 ; v1(79.65,18.15) v1(79.65,21.8)
  Bottom Layer w0.254: C19.1@34.978,18.328 cw(c34.682,18.032) 35.1,18.032 cw(c35.518,18.032) C19.1@35.222,18.328 ; C19.1@35.1,18.6 35.1,18 35.6,17.5 v1(37.7,17.5) ; v1@37.61,17.41 ccw(c37.393,17.193) 37.393,17.5 ccw(c37.393,17.807) v1@37.61,17.59 ; v1@37.667,17.623 ccw(c37.588,17.919) 37.853,17.766 ccw(c38.119,17.612) v1@37.823,17.533 ; v1@37.7,17.627 ccw(c37.7,17.934) 37.917,17.717 ccw(c38.134,17.5) v1@37.827,17.5 ; R15.2@38.077,18.488 cw(c36.784,18.416) v1(37.7,17.5) ; 38.102,17.902 ccw(c37.545,18.458) R15.2@38.331,18.502 ; R15.2@38.183,18.31 cw(c38.053,18.1) 38.3,18.1 ; R15.2@38.417,18.31 ccw(c38.547,18.1) 38.3,18.1 ; R15.2@38.458,18.442 cw(c38.838,18.062) 38.838,18.6 cw(c38.838,19.138) R15.2@38.458,18.758 ; R14.1@40.142,18.442 ccw(c39.762,18.062) 39.762,18.6 ccw(c39.762,19.138) R14.1@40.142,18.758 ; R14.1@40.3,18.6 R15.2@38.3,18.6 38.3,18.1 ; v1(45.7,14.2) v1(57.4,14.2) ; v1@45.79,14.11 cw(c46.007,13.893) 46.007,14.2 cw(c46.007,14.507) v1@45.79,14.29 ; v1@57.31,14.11 ccw(c57.093,13.893) 57.093,14.2 ccw(c57.093,14.507) v1@57.31,14.29 ; v1(70.8,14.2) 78.9,14.2 79.65,14.95 v1(79.65,18.15) ; v1@70.89,14.11 cw(c71.107,13.893) 71.107,14.2 cw(c71.107,14.507) v1@70.89,14.29 ; v1@79.56,18.06 cw(c79.343,17.843) 79.65,17.843 cw(c79.957,17.843) v1@79.74,18.06 ; v1@79.56,21.89 ccw(c79.343,22.107) 79.65,22.107 ccw(c79.957,22.107) v1@79.74,21.89 ; v1(79.65,21.8) U1.11@79.65,24.25 ; v1(37.7,17.5) 38.3,18.1
AUX: J3.5
BAT: J5.2 J6.1 | length 25.5
  Bottom Layer w1.016: J5.2@36.565,2.5 38.342,0.724 58.852,0.724 J6.1@60.63,2.502
BOOT0: R4.1 U1.44 | length 8.1
  Top Layer w0.254: v1(84.5,29.9) 85.7,29.9 ; v1@84.59,29.81 cw(c84.807,29.593) 84.807,29.9 cw(c84.807,30.207) v1@84.59,29.99 ; R4.1@86.028,29.017 ccw(c84.901,29.101) 85.7,29.9 ; 86.091,29.509 cw(c85.63,29.047) R4.1@86.281,28.998 ; R4.1@86.4,29.2 85.7,29.9
  Bottom Layer w0.254: v1@84.41,29.81 cw(c84.193,29.593) 84.5,29.593 cw(c84.807,29.593) v1@84.59,29.81 ; v1(84.5,29.9) 84.5,28.4 85.15,27.75 U1.44@86.15,27.75
CH+: D4.1 J7.1 K1.3 K1.6 | length 42
  Bottom Layer w1.016: K1.3@60.892,9.2 ccw(c63.045,9.2) D4.1@61.523,7.677 ; K1.3@60.894,9.206 ccw(c61.356,8.756) 60.9,8.3 ; K1.6@60.9,16.7 K1.3@60.9,9.7 60.9,8.3 ; D4.1@61.431,7.769 ccw(c62.1,8.438) D4.1@62.1,7.492 ; D4.1@62.1,6.708 cw(c62.1,5.762) D4.1@62.769,6.431 ; J7.1@86.73,2.502 85.328,1.1 68.1,1.1 D4.1@62.1,7.1 60.9,8.3
CH+OUT: J5.3 K1.4 K1.5 | length 30.6
  Bottom Layer w1.016: J5.3@39.105,2.5 41.8,2.5 46.1,6.8 56.6,6.8 58.7,8.9 K1.4@58.7,9.7 K1.5@58.7,16.7 ; 58.502,8.702 ccw(c58.003,9.2) K1.4@58.708,9.2